# Altium PCB demo_board_routed_DDR.PcbDoc (part 1 of 2)
Units mil, origin at the board's own origin, x right, y up, seen from the top; angles counter-clockwise.
Board outline 6000 x 4000 mil, 4 copper layers (L1, L2, L3, L4), stack 64.6 mil thick; 2 components, 43 nets, 316 pads, 106 vias.
Unrouted connection lines stored in the file: 5.
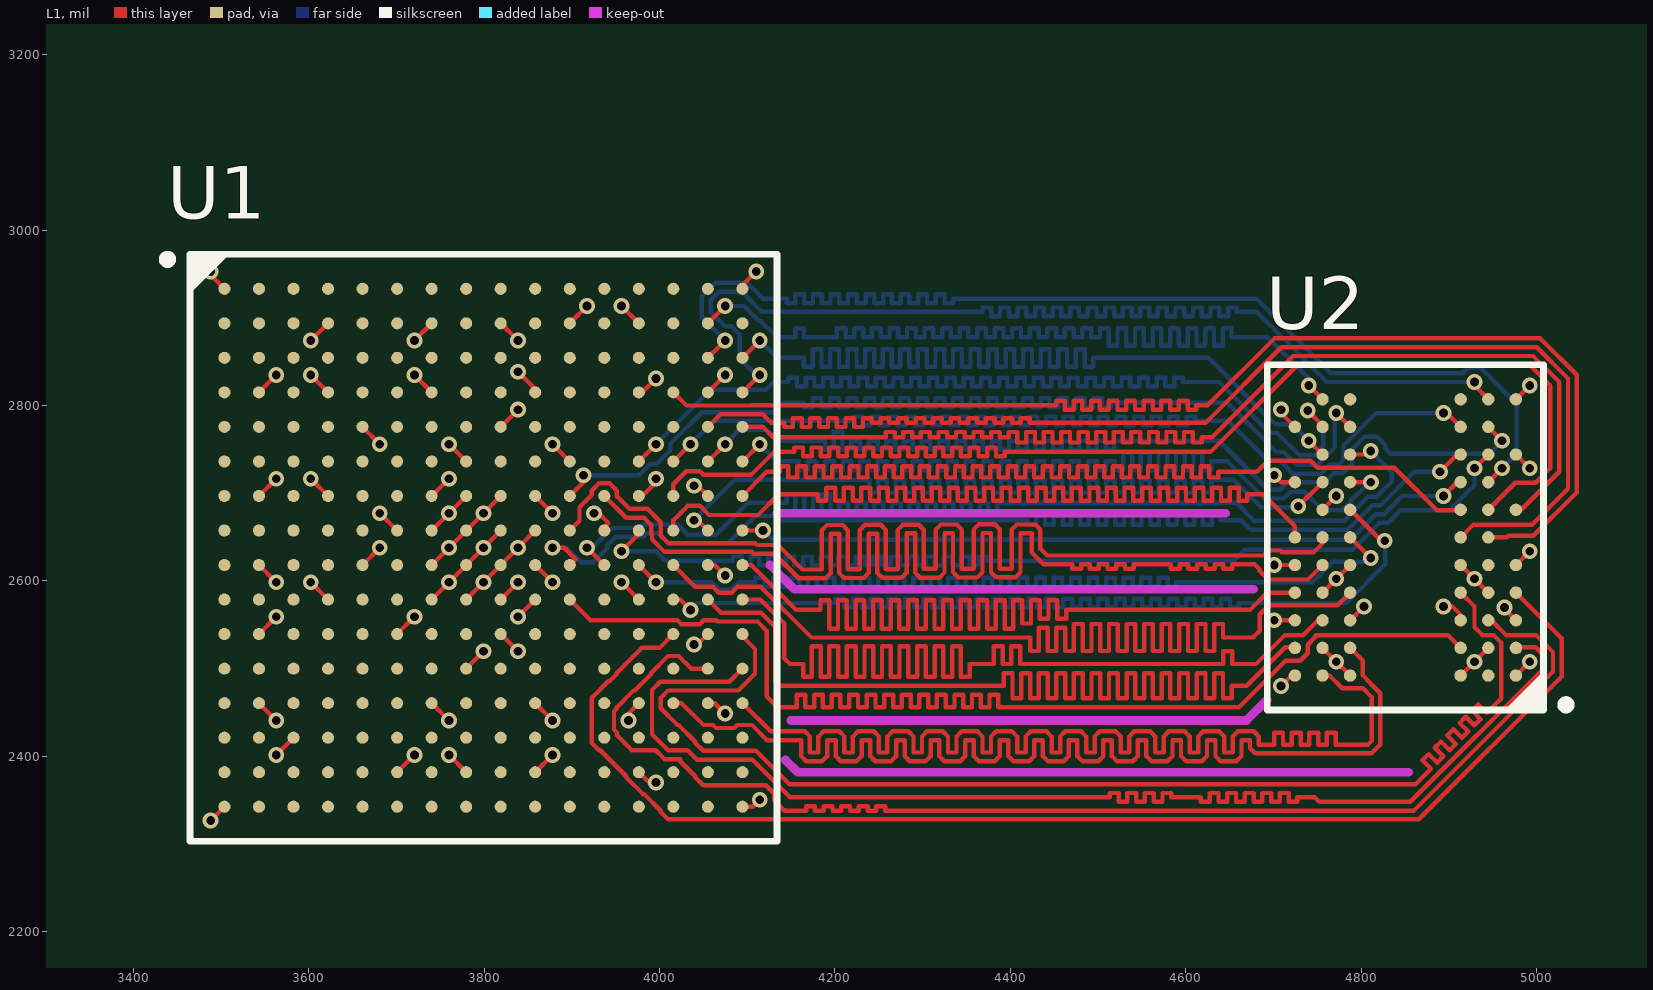
[diagram p0: L1 view]
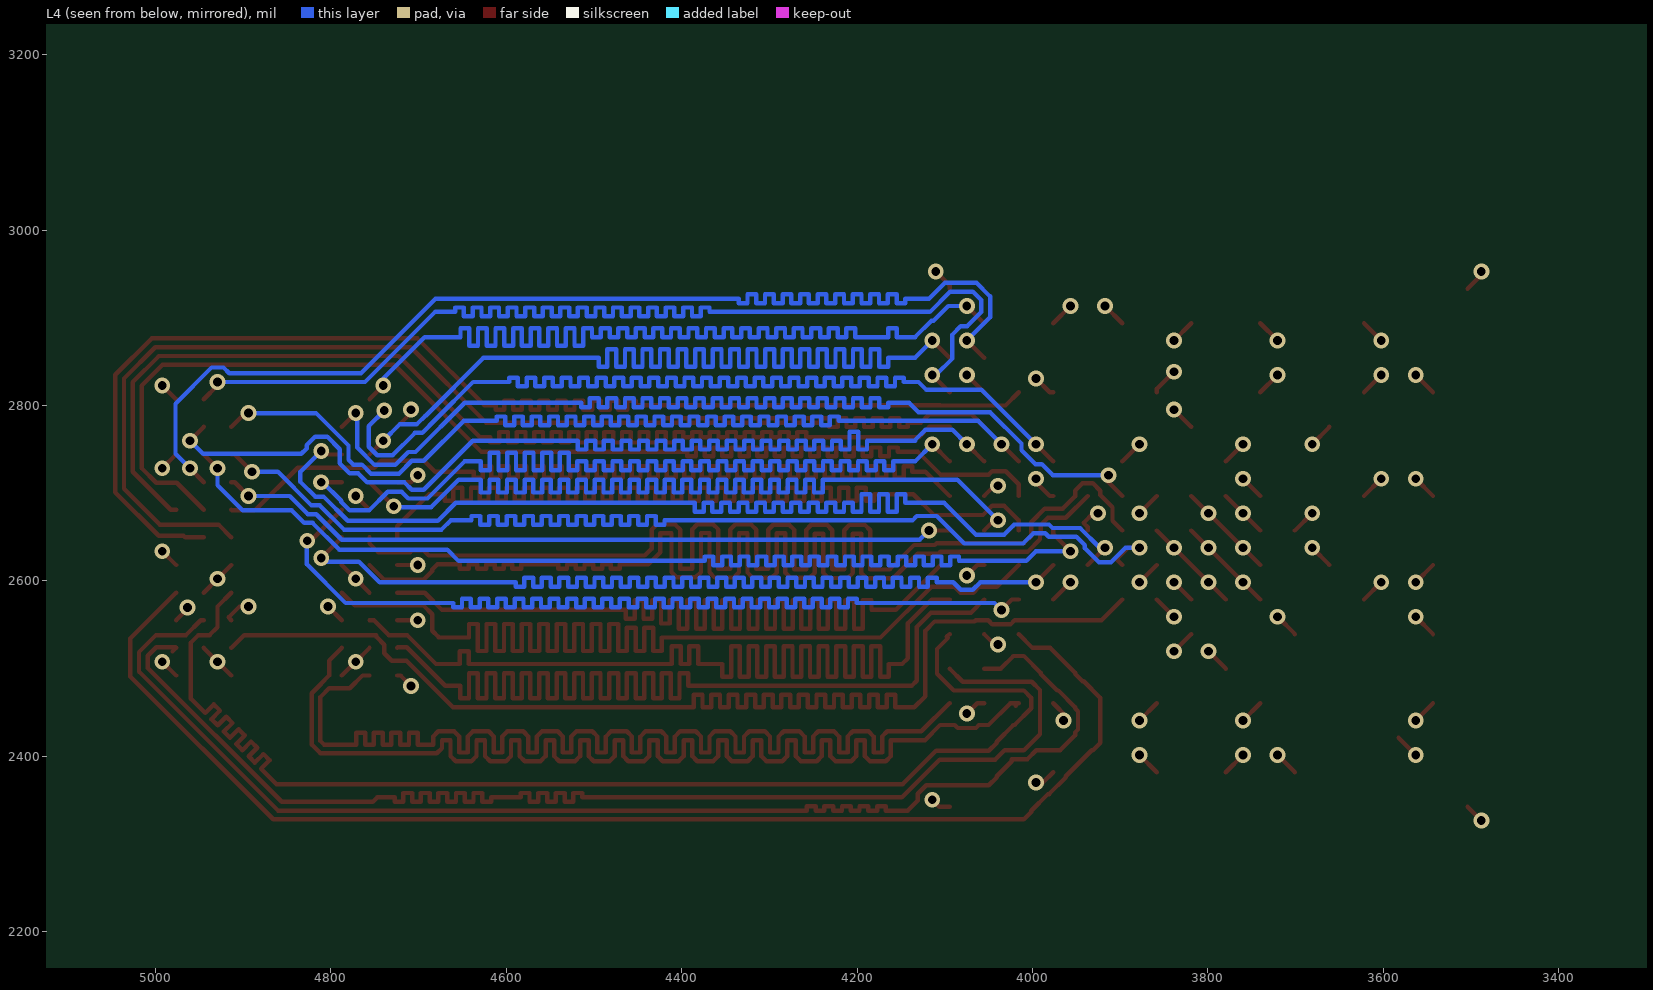
[diagram p1: L4 view, seen from below]
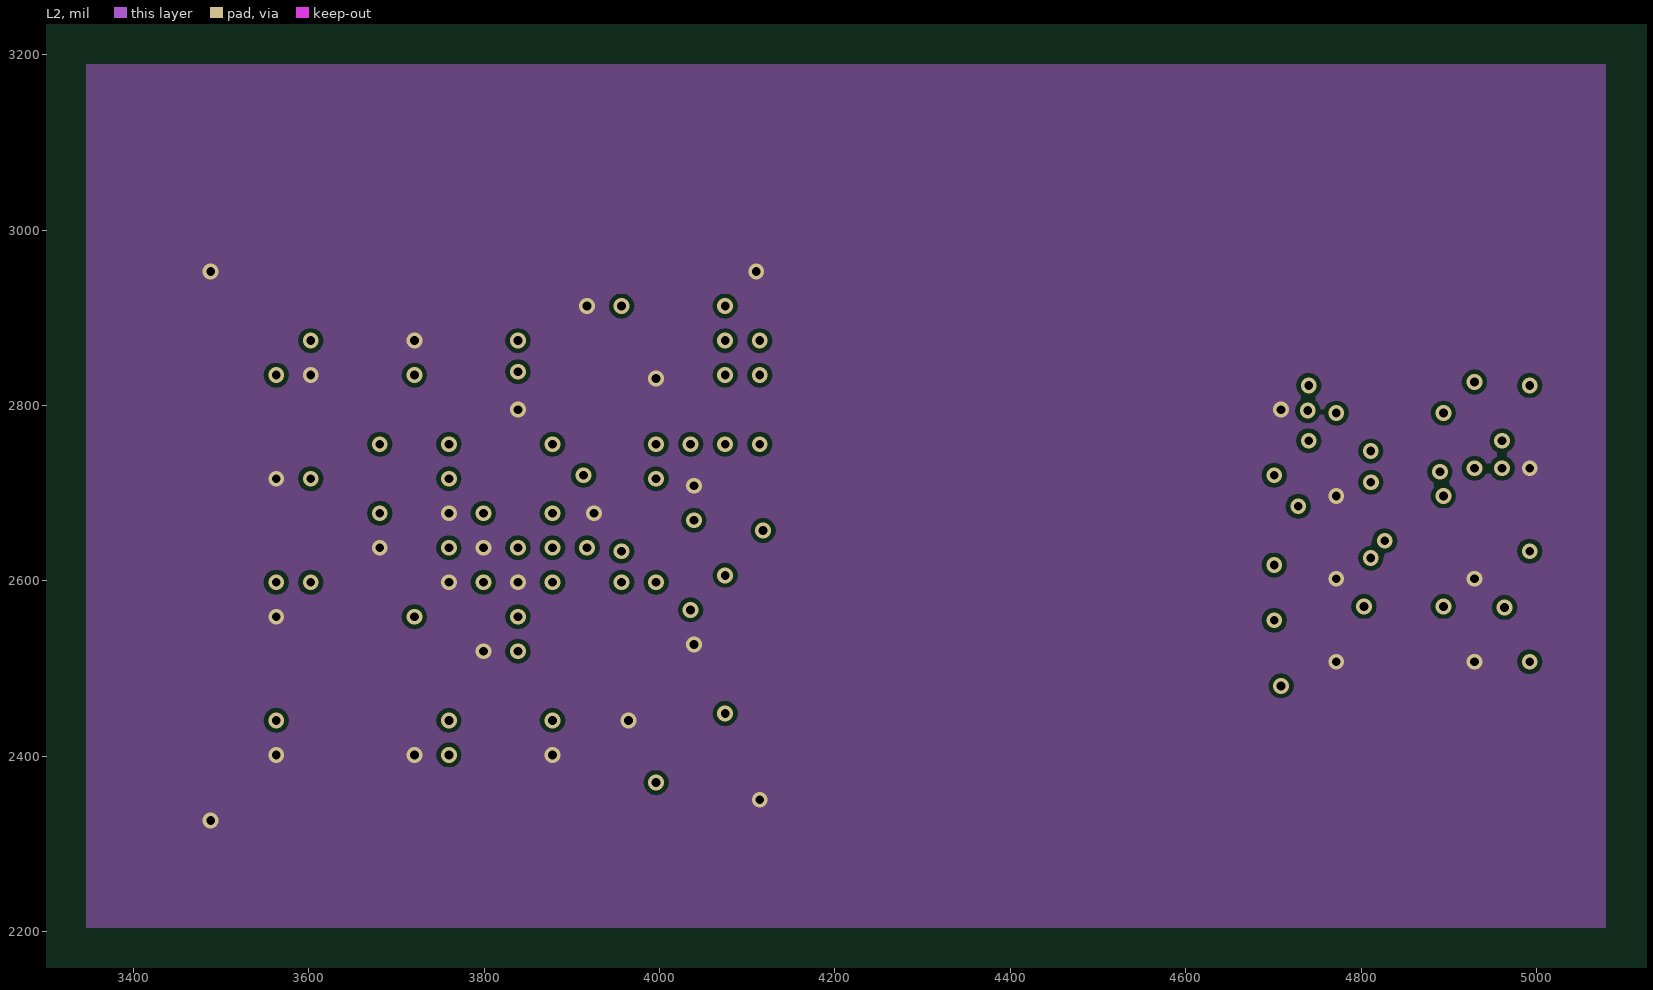
[diagram p2: L2]
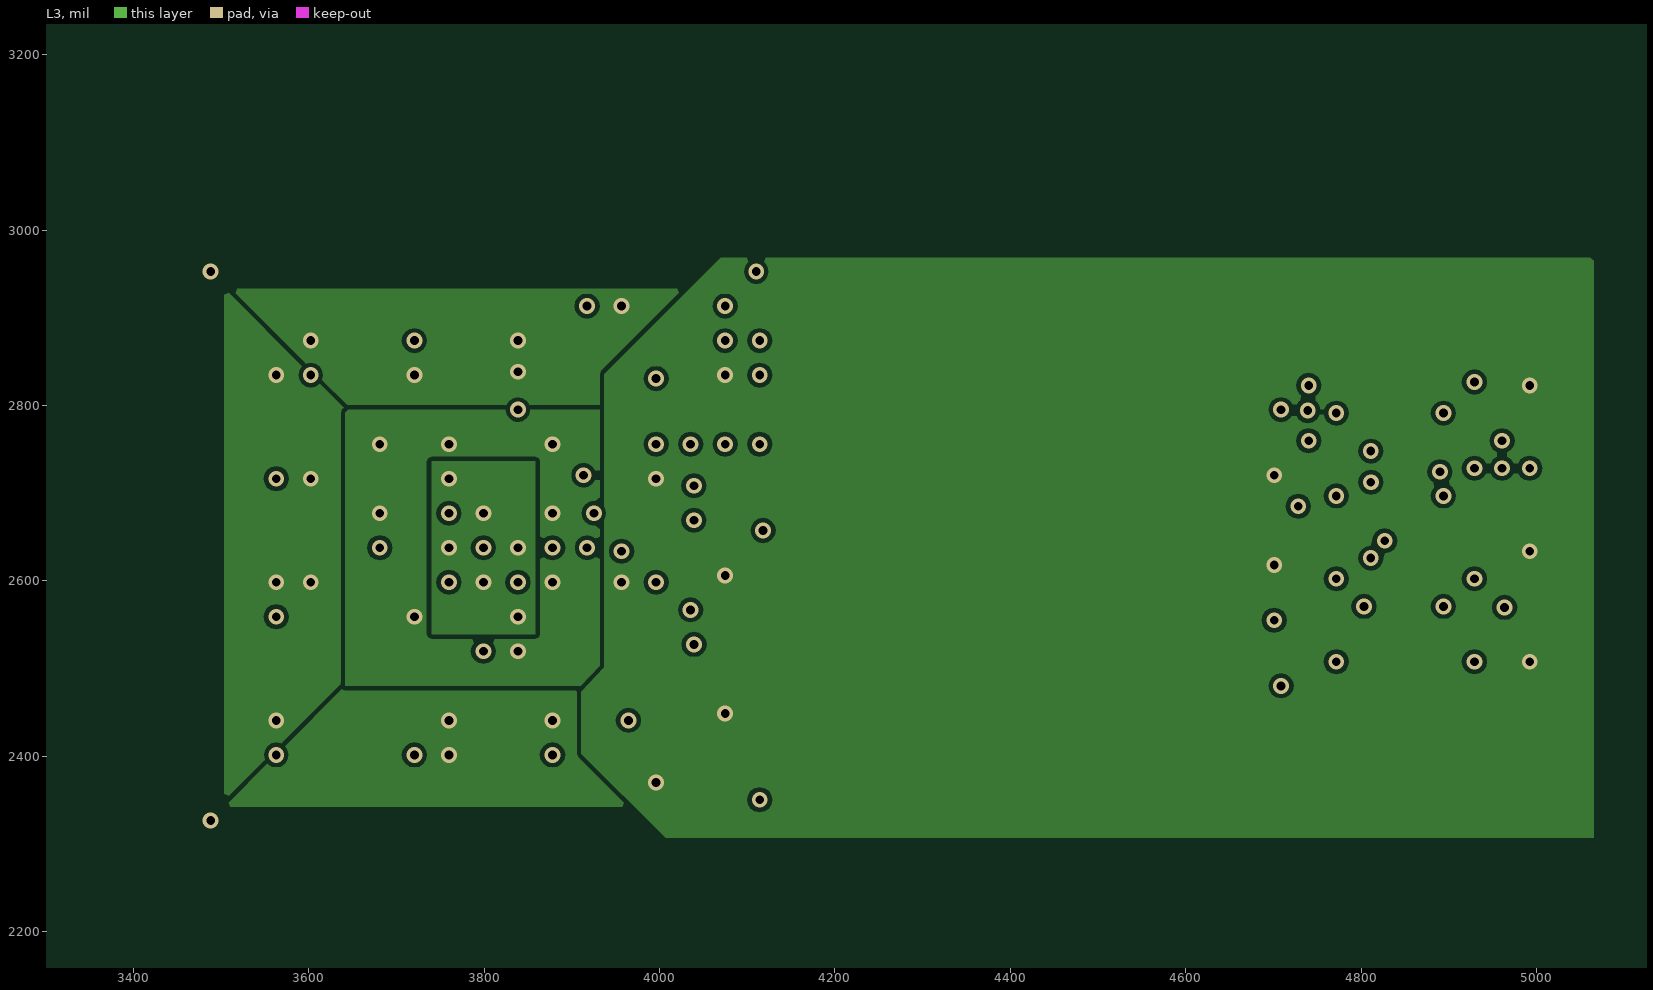
[diagram p3: L3]

## Layer stack, top to bottom
Top Solder: solder mask 0.4, Solder Resist, Dk 3.5
L1: signal copper 1.4
Prepreg 1: prepreg 6.7, FR-408, Dk 3.66
L2: signal copper 0.7
Core: core 47, FR-408, Dk 3.66
L3: signal copper 0.7
Prepreg 2: prepreg 6.7, FR-408, Dk 3.66
L4: signal copper 1.4
Bottom Solder: solder mask 0.4, Solder Resist, Dk 3.5

## Board outline
1000,1000 7000,1000 7000,5000 1000,5000

## Design rules (kind name [scope] priority, off if disabled: settings)
Clearance [All] p1: gap=5
DiffPairsRouting [All] p1: maxlimit=10 minlimit=5 mostfreqgap=5 toplayer_minwidth=5 toplayer_maxwidth=15 toplayer_prefwidth=5 midlayer1_minwidth=5 midlayer1_maxwidth=15 midlayer1_prefwidth=5 midlayer2_minwidth=5 midlayer2_maxwidth=15 midlayer2_prefwidth=5 bottomlayer_minwidth=5 bottomlayer_maxwidth=15 bottomlayer_prefwidth=5 maxuncoupledlength=500
HoleSize [All] p1: absolutevalues=TRUE maxlimit=100 minlimit=10 maxpercent=80.000 minpercent=20.000
MinimumAnnularRing [All] p1: minimumring=4
PlaneClearance [All] p1: clearance=10
PlaneConnect PlaneConnect_via [IsVia] p1: planeconnectstyle=Direct reliefexpansion=20 reliefentries=4 reliefconductorwidth=10 reliefairgap=10
PlaneConnect [All] p2: planeconnectstyle=Relief reliefexpansion=20 reliefentries=4 reliefconductorwidth=10 reliefairgap=10
PolygonConnect PolygonConnect_via [All vs IsVia] p1: connectstyle=Direct reliefconductorwidth=10 reliefentries=4 polygonreliefangle="90 Angle" airgapwidth=10
PolygonConnect [All] p2: connectstyle=Relief reliefconductorwidth=10 reliefentries=4 polygonreliefangle="90 Angle" airgapwidth=10
RoutingVias [All] p1: holewidth=10 width=32 viastyle="Through Hole" minholewidth=10 minwidth=18 maxholewidth=50 maxwidth=100
SolderMaskExpansion [All] p1: expansion=4
UnpouredPolygon [All] p1: allowunpoured=FALSE
Width [All] p1: maxlimit=100 minlimit=5 preferedwidth=10
25 further rules are at their usual default settings.

## Classes and differential pairs
net class DDR_O: BA0 BA1 BA2 CAS# CK_N CK_P CKE DM/RDQS DQS_N DQS_P NetU2_A2 ODT RAS# WE#
net class DDR_D: DQ0 DQ1 DQ2 DQ3 DQ4 DQ5 DQ6 DQ7
net class DDR_A: A0 A1 A2 A3 A4 A5 A6 A7 A8 A9 A10 A11 A12 A13
differential pair CK: +CK_P -CK_N
differential pair DQS: +DQS_P -DQS_N

## Components (designator, comment, footprint, x,y, rotation, side; value= is the part's Value field where it differs from the comment)
U1 "XC6SLX16-2FTG256C" Xilinx_FT256 3799.21,2637.8 r0 top
U2 "AS4C128M8D2-25BCN" Alliance_FBGA60 4850.39,2649.61 r180 top

## Footprints (in the part's own frame and the unit in brackets; to place one, negate y for a bottom-side part, rotate by r counter-clockwise, add the part's x,y. Pads: shape width x height; smd on the part's side, far side on the other; paste and mask are expansions set on the pad)
Alliance_FBGA60 [mm] "BGA, 60-Leads, Body 8.00x10.00mmx1.20mm, Pitch 0.80mm"
  round 0.36 smd: A1(-3.2,4) A2(-2.4,4) A3(-1.6,4) A7(1.6,4) A8(2.4,4) A9(3.2,4) B1(-3.2,3.2) B2(-2.4,3.2) B3(-1.6,3.2) B7(1.6,3.2) B8(2.4,3.2) B9(3.2,3.2) C1(-3.2,2.4) C2(-2.4,2.4) C3(-1.6,2.4) C7(1.6,2.4) C8(2.4,2.4) C9(3.2,2.4) D1(-3.2,1.6) D2(-2.4,1.6) D3(-1.6,1.6) D7(1.6,1.6) D8(2.4,1.6) D9(3.2,1.6) E1(-3.2,0.8) E2(-2.4,0.8) E3(-1.6,0.8) E7(1.6,0.8) E8(2.4,0.8) E9(3.2,0.8) F2(-2.4,0) F3(-1.6,0) F7(1.6,0) F8(2.4,0) F9(3.2,0) G1(-3.2,-0.8) G2(-2.4,-0.8) G3(-1.6,-0.8) G7(1.6,-0.8) G8(2.4,-0.8) H2(-2.4,-1.6) H3(-1.6,-1.6) H7(1.6,-1.6) H8(2.4,-1.6) H9(3.2,-1.6) J1(-3.2,-2.4) J2(-2.4,-2.4) J3(-1.6,-2.4) J7(1.6,-2.4) J8(2.4,-2.4) K2(-2.4,-3.2) K3(-1.6,-3.2) K7(1.6,-3.2) K8(2.4,-3.2) K9(3.2,-3.2) L1(-3.2,-4) L2(-2.4,-4) L3(-1.6,-4) L7(1.6,-4) L8(2.4,-4)
  silkscreen extent -4.78,-5 4,5, body extent -4,-5 4,5, height 1.2
Xilinx_FT256 [mm] "BGA, 256-Leads, Body 17.00x17.00mmx1.55mm, Pitch 1.00mm"
  round 0.35 smd: A1(-7.5,7.5) A2(-6.5,7.5) A3(-5.5,7.5) A4(-4.5,7.5) A5(-3.5,7.5) A6(-2.5,7.5) A7(-1.5,7.5) A8(-0.5,7.5) A9(0.5,7.5) A10(1.5,7.5) A11(2.5,7.5) A12(3.5,7.5) A13(4.5,7.5) A14(5.5,7.5) A15(6.5,7.5) A16(7.5,7.5) B1(-7.5,6.5) B2(-6.5,6.5) B3(-5.5,6.5) B4(-4.5,6.5) B5(-3.5,6.5) B6(-2.5,6.5) B7(-1.5,6.5) B8(-0.5,6.5) B9(0.5,6.5) B10(1.5,6.5) B11(2.5,6.5) B12(3.5,6.5) B13(4.5,6.5) B14(5.5,6.5) B15(6.5,6.5) B16(7.5,6.5) C1(-7.5,5.5) C2(-6.5,5.5) C3(-5.5,5.5) C4(-4.5,5.5) C5(-3.5,5.5) C6(-2.5,5.5) C7(-1.5,5.5) C8(-0.5,5.5) C9(0.5,5.5) C10(1.5,5.5) C11(2.5,5.5) C12(3.5,5.5) C13(4.5,5.5) C14(5.5,5.5) C15(6.5,5.5) C16(7.5,5.5) D1(-7.5,4.5) D2(-6.5,4.5) D3(-5.5,4.5) D4(-4.5,4.5) D5(-3.5,4.5) D6(-2.5,4.5) D7(-1.5,4.5) D8(-0.5,4.5) D9(0.5,4.5) D10(1.5,4.5) D11(2.5,4.5) D12(3.5,4.5) D13(4.5,4.5) D14(5.5,4.5) D15(6.5,4.5) D16(7.5,4.5) E1(-7.5,3.5) E2(-6.5,3.5) E3(-5.5,3.5) E4(-4.5,3.5) E5(-3.5,3.5) E6(-2.5,3.5) E7(-1.5,3.5) E8(-0.5,3.5) E9(0.5,3.5) E10(1.5,3.5) E11(2.5,3.5) E12(3.5,3.5) E13(4.5,3.5) E14(5.5,3.5) E15(6.5,3.5) E16(7.5,3.5) F1(-7.5,2.5) F2(-6.5,2.5) F3(-5.5,2.5) F4(-4.5,2.5) F5(-3.5,2.5) F6(-2.5,2.5) F7(-1.5,2.5) F8(-0.5,2.5) F9(0.5,2.5) F10(1.5,2.5) F11(2.5,2.5) F12(3.5,2.5) F13(4.5,2.5) F14(5.5,2.5) F15(6.5,2.5) F16(7.5,2.5) G1(-7.5,1.5) G2(-6.5,1.5) G3(-5.5,1.5) G4(-4.5,1.5) G5(-3.5,1.5) G6(-2.5,1.5) G7(-1.5,1.5) G8(-0.5,1.5) G9(0.5,1.5) G10(1.5,1.5) G11(2.5,1.5) G12(3.5,1.5) G13(4.5,1.5) G14(5.5,1.5) G15(6.5,1.5) G16(7.5,1.5) H1(-7.5,0.5) H2(-6.5,0.5) H3(-5.5,0.5) H4(-4.5,0.5) H5(-3.5,0.5) H6(-2.5,0.5) H7(-1.5,0.5) H8(-0.5,0.5) H9(0.5,0.5) H10(1.5,0.5) H11(2.5,0.5) H12(3.5,0.5) H13(4.5,0.5) H14(5.5,0.5) H15(6.5,0.5) H16(7.5,0.5) J1(-7.5,-0.5) J2(-6.5,-0.5) J3(-5.5,-0.5) J4(-4.5,-0.5) J5(-3.5,-0.5) J6(-2.5,-0.5) J7(-1.5,-0.5) J8(-0.5,-0.5) J9(0.5,-0.5) J10(1.5,-0.5) J11(2.5,-0.5) J12(3.5,-0.5) J13(4.5,-0.5) J14(5.5,-0.5) J15(6.5,-0.5) J16(7.5,-0.5) K1(-7.5,-1.5) K2(-6.5,-1.5) K3(-5.5,-1.5) K4(-4.5,-1.5) K5(-3.5,-1.5) K6(-2.5,-1.5) K7(-1.5,-1.5) K8(-0.5,-1.5) K9(0.5,-1.5) K10(1.5,-1.5) K11(2.5,-1.5) K12(3.5,-1.5) K13(4.5,-1.5) K14(5.5,-1.5) K15(6.5,-1.5) K16(7.5,-1.5) L1(-7.5,-2.5) L2(-6.5,-2.5) L3(-5.5,-2.5) L4(-4.5,-2.5) L5(-3.5,-2.5) L6(-2.5,-2.5) L7(-1.5,-2.5) L8(-0.5,-2.5) L9(0.5,-2.5) L10(1.5,-2.5) L11(2.5,-2.5) L12(3.5,-2.5) L13(4.5,-2.5) L14(5.5,-2.5) L15(6.5,-2.5) L16(7.5,-2.5) M1(-7.5,-3.5) M2(-6.5,-3.5) M3(-5.5,-3.5) M4(-4.5,-3.5) M5(-3.5,-3.5) M6(-2.5,-3.5) M7(-1.5,-3.5) M8(-0.5,-3.5) M9(0.5,-3.5) M10(1.5,-3.5) M11(2.5,-3.5) M12(3.5,-3.5) M13(4.5,-3.5) M14(5.5,-3.5) M15(6.5,-3.5) M16(7.5,-3.5) N1(-7.5,-4.5) N2(-6.5,-4.5) N3(-5.5,-4.5) N4(-4.5,-4.5) N5(-3.5,-4.5) N6(-2.5,-4.5) N7(-1.5,-4.5) N8(-0.5,-4.5) N9(0.5,-4.5) N10(1.5,-4.5) N11(2.5,-4.5) N12(3.5,-4.5) N13(4.5,-4.5) N14(5.5,-4.5) N15(6.5,-4.5) N16(7.5,-4.5) P1(-7.5,-5.5) P2(-6.5,-5.5) P3(-5.5,-5.5) P4(-4.5,-5.5) P5(-3.5,-5.5) P6(-2.5,-5.5) P7(-1.5,-5.5) P8(-0.5,-5.5) P9(0.5,-5.5) P10(1.5,-5.5) P11(2.5,-5.5) P12(3.5,-5.5) P13(4.5,-5.5) P14(5.5,-5.5) P15(6.5,-5.5) P16(7.5,-5.5) R1(-7.5,-6.5) R2(-6.5,-6.5) R3(-5.5,-6.5) R4(-4.5,-6.5) R5(-3.5,-6.5) R6(-2.5,-6.5) R7(-1.5,-6.5) R8(-0.5,-6.5) R9(0.5,-6.5) R10(1.5,-6.5) R11(2.5,-6.5) R12(3.5,-6.5) R13(4.5,-6.5) R14(5.5,-6.5) R15(6.5,-6.5) R16(7.5,-6.5) T1(-7.5,-7.5) T2(-6.5,-7.5) T3(-5.5,-7.5) T4(-4.5,-7.5) T5(-3.5,-7.5) T6(-2.5,-7.5) T7(-1.5,-7.5) T8(-0.5,-7.5) T9(0.5,-7.5) T10(1.5,-7.5) T11(2.5,-7.5) T12(3.5,-7.5) T13(4.5,-7.5) T14(5.5,-7.5) T15(6.5,-7.5) T16(7.5,-7.5)
  silkscreen extent -9.27,-8.5 8.5,8.5, body extent -8.5,-8.5 8.5,8.5, height 1.55

## Via types
v1: diameter 18, hole 10, L1 to L4, 106 vias

## Nets (pads, with @x,y where several pads share a name; then routed paths per layer and width w, separated by ;. In a path a pad name is that pad's centre, name@x,y a point inside that pad or via, vN(x,y) a via of type N, cw(c..) or ccw(c..) an arc to the next point about the centre after c; other vN are vias at no path point)
A0: U1.H15 U2.H8 | length 1377.3
  L1 w5: v1(4039.18,2669.1) 4039.18,2673.05 4039.36,2673.24 U1.H15@4055.12,2657.48 ; v1(4728.34,2685.03) U2.H8@4755.91,2712.6
  L4 w5: v1(4039.18,2669.1) 4085.63,2715.55 4098.43,2715.55 4239.09,2715.55 4239.09,2700.8 4249.09,2700.8 4249.09,2715.55 4259.09,2715.55 4259.09,2700.8 4269.09,2700.8 4269.09,2715.55 4279.09,2715.55 4279.09,2700.8 4289.09,2700.8 4289.09,2715.55 4299.09,2715.55 4299.09,2700.8 4309.09,2700.8 4309.09,2715.55 4319.09,2715.55 4319.09,2700.8 4329.09,2700.8 4329.09,2715.55 4339.09,2715.55 4339.09,2700.8 4349.09,2700.8 4349.09,2715.55 4359.09,2715.55 4359.09,2700.8 4369.09,2700.8 4369.09,2715.55 4379.09,2715.55 4379.09,2700.8 4389.09,2700.8 4389.09,2715.55 4399.09,2715.55 4399.09,2700.8 4409.09,2700.8 4409.09,2715.55 4419.09,2715.55 4419.09,2700.8 4429.09,2700.8 4429.09,2715.55 4439.09,2715.55 4439.09,2700.8 4449.09,2700.8 4449.09,2715.55 4459.09,2715.55 4459.09,2700.8 4469.09,2700.8 4469.09,2715.55 4479.09,2715.55 4479.09,2700.8 4489.09,2700.8 4489.09,2715.55 4499.09,2715.55 4499.09,2700.8 4509.09,2700.8 4509.09,2715.55 4519.09,2715.55 4519.09,2700.8 4529.09,2700.8 4529.09,2715.55 4539.09,2715.55 4539.09,2700.8 4549.09,2700.8 4549.09,2715.55 4559.09,2715.55 4559.09,2700.8 4569.09,2700.8 4569.09,2715.55 4579.09,2715.55 4579.09,2700.8 4589.09,2700.8 4589.09,2715.55 4599.09,2715.55 4599.09,2700.8 4609.09,2700.8 4609.09,2715.55 4619.09,2715.55 4619.09,2700.8 4629.09,2700.8 4629.09,2715.55 4639.09,2715.55 4649.09,2715.55 4654.09,2715.55 4685.67,2683.97 4727.28,2683.97 v1(4728.34,2685.03)
A1: U1.H16 U2.H3 | length 850.5
  L1 w5: U1.H16@4094.49,2657.48 v1(4118.1,2657.47) ; v1(4893.7,2696.85) 4909.45,2712.6 U2.H3@4913.39,2712.6
  L4 w5: v1(4118.1,2657.47) 4128.72,2646.85 4145.67,2646.85 4598.43,2646.85 4787.42,2646.85 4816.66,2676.1 4826.14,2676.1 4846.89,2696.85 v1(4893.7,2696.85)
A2: U1.F16 U2.H7 | length 1380
  L1 w5: U1.F16@4094.49,2736.22 v1(4114.17,2755.91) ; U2.H7@4787.4,2712.6 v1(4811.02,2712.6)
  L4 w5: v1(4114.17,2755.91) 4133.86,2736.22 4149.61,2736.22 4158.86,2736.22 4158.86,2726.22 4168.86,2726.22 4168.86,2736.22 4178.86,2736.22 4178.86,2726.22 4188.86,2726.22 4188.86,2736.22 4198.86,2736.22 4198.86,2726.22 4208.86,2726.22 4208.86,2736.22 4218.86,2736.22 4218.86,2726.22 4228.86,2726.22 4228.86,2736.22 4238.86,2736.22 4238.86,2726.22 4248.86,2726.22 4248.86,2736.22 4258.86,2736.22 4258.86,2726.22 4268.86,2726.22 4268.86,2736.22 4278.86,2736.22 4278.86,2726.22 4288.86,2726.22 4288.86,2736.22 4298.86,2736.22 4298.86,2726.22 4308.86,2726.22 4308.86,2736.22 4318.86,2736.22 4318.86,2726.22 4328.86,2726.22 4328.86,2736.22 4338.86,2736.22 4338.86,2726.22 4348.86,2726.22 4348.86,2736.22 4358.86,2736.22 4358.86,2726.22 4368.86,2726.22 4368.86,2736.22 4378.86,2736.22 4378.86,2726.22 4388.86,2726.22 4388.86,2736.22 4398.86,2736.22 4398.86,2726.22 4408.86,2726.22 4408.86,2736.22 4418.86,2736.22 4418.86,2726.22 4428.86,2726.22 4428.86,2736.22 4438.86,2736.22 4438.86,2726.22 4448.86,2726.22 4448.86,2736.22 4458.86,2736.22 4458.86,2726.22 4468.86,2726.22 4468.86,2736.22 4478.86,2736.22 4478.86,2726.22 4488.86,2726.22 4488.86,2736.22 4498.86,2736.22 4498.86,2726.22 4508.86,2726.22 4508.86,2736.22 4518.86,2736.22 4518.86,2726.22 4528.86,2726.22 4528.86,2736.22 4528.86,2746.22 4538.86,2746.22 4538.86,2736.22 4538.86,2726.22 4548.86,2726.22 4548.86,2736.22 4548.86,2746.22 4558.86,2746.22 4558.86,2736.22 4558.86,2726.22 4568.86,2726.22 4568.86,2736.22 4568.86,2746.22 4578.86,2746.22 4578.86,2736.22 4578.86,2726.22 4588.86,2726.22 4588.86,2736.22 4588.86,2746.22 4598.86,2746.22 4598.86,2736.22 4598.86,2726.22 4608.86,2726.22 4608.86,2736.22 4608.86,2746.22 4618.86,2746.22 4618.86,2736.22 4618.86,2726.22 4628.86,2726.22 4628.86,2736.22 4633.86,2736.22 4647.56,2736.22 4689.81,2693.97 4711.76,2693.97 4719.33,2701.53 4735.17,2701.53 4756.36,2680.35 4778.49,2680.35 4788.15,2690.02 4788.15,2691.31 4809.44,2712.6 v1(4811.02,2712.6)
A3: U1.H13 U2.J2 | length 1376.2
  L1 w5: v1(3956.69,2633.86) 3976.38,2653.54 U1.H13@3976.38,2657.48 ; v1(4929.13,2728.35) U2.J2@4944.88,2744.09
  L4 w5: v1(3956.69,2633.86) 3996.06,2633.86 4007.13,2622.79 4078.74,2622.79 4083.74,2622.79 4083.74,2627.79 4093.74,2627.79 4093.74,2622.79 4093.74,2617.79 4103.74,2617.79 4103.74,2622.79 4103.74,2627.79 4113.74,2627.79 4113.74,2622.79 4113.74,2617.79 4123.74,2617.79 4123.74,2622.79 4123.74,2627.79 4133.74,2627.79 4133.74,2622.79 4133.74,2617.79 4143.74,2617.79 4143.74,2622.79 4143.74,2627.79 4153.74,2627.79 4153.74,2622.79 4153.74,2617.79 4163.74,2617.79 4163.74,2622.79 4163.74,2627.79 4173.74,2627.79 4173.74,2622.79 4173.74,2617.79 4183.74,2617.79 4183.74,2622.79 4183.74,2627.79 4193.74,2627.79 4193.74,2622.79 4193.74,2617.79 4203.74,2617.79 4203.74,2622.79 4203.74,2627.79 4213.74,2627.79 4213.74,2622.79 4213.74,2617.79 4223.74,2617.79 4223.74,2622.79 4223.74,2627.79 4233.74,2627.79 4233.74,2622.79 4233.74,2617.79 4243.74,2617.79 4243.74,2622.79 4243.74,2627.79 4253.74,2627.79 4253.74,2622.79 4253.74,2617.79 4263.74,2617.79 4263.74,2622.79 4263.74,2627.79 4273.74,2627.79 4273.74,2622.79 4273.74,2617.79 4283.74,2617.79 4283.74,2622.79 4283.74,2627.79 4293.74,2627.79 4293.74,2622.79 4293.74,2617.79 4303.74,2617.79 4303.74,2622.79 4303.74,2627.79 4313.74,2627.79 4313.74,2622.79 4313.74,2617.79 4323.74,2617.79 4323.74,2622.79 4323.74,2627.79 4333.74,2627.79 4333.74,2622.79 4333.74,2617.79 4343.74,2617.79 4343.74,2622.79 4343.74,2627.79 4353.74,2627.79 4353.74,2622.79 4353.74,2617.79 4363.74,2617.79 4363.74,2622.79 4363.74,2627.79 4373.74,2627.79 4373.74,2622.79 4374.02,2622.79 4654.29,2622.79 4667.17,2635.67 4790.38,2635.67 4820.8,2666.1 4830.28,2666.1 4844.54,2680.35 4900.54,2680.35 4929.13,2708.95 v1(4929.13,2728.35)
A4: U1.C16 U2.J8 | length 1383.4
  L1 w5: U1.C16@4094.49,2854.33 v1(4114.17,2874.02) ; v1(4740.16,2759.84) U2.J8@4755.91,2744.09
  L4 w5: v1(4114.17,2874.02) 4133.86,2854.33 4149.61,2854.33 4154.61,2854.33 4164.61,2854.33 4164.61,2844.33 4174.61,2844.33 4174.61,2854.33 4174.61,2864.33 4184.61,2864.33 4184.61,2854.33 4184.61,2844.33 4194.61,2844.33 4194.61,2854.33 4194.61,2864.33 4204.61,2864.33 4204.61,2854.33 4204.61,2844.33 4214.61,2844.33 4214.61,2854.33 4214.61,2864.33 4224.61,2864.33 4224.61,2854.33 4224.61,2844.33 4234.61,2844.33 4234.61,2854.33 4234.61,2864.33 4244.61,2864.33 4244.61,2854.33 4244.61,2844.33 4254.61,2844.33 4254.61,2854.33 4254.61,2864.33 4264.61,2864.33 4264.61,2854.33 4264.61,2844.33 4274.61,2844.33 4274.61,2854.33 4274.61,2864.33 4284.61,2864.33 4284.61,2854.33 4284.61,2844.33 4294.61,2844.33 4294.61,2854.33 4294.61,2864.33 4304.61,2864.33 4304.61,2854.33 4304.61,2844.33 4314.61,2844.33 4314.61,2854.33 4314.61,2864.33 4324.61,2864.33 4324.61,2854.33 4324.61,2844.33 4334.61,2844.33 4334.61,2854.33 4334.61,2864.33 4344.61,2864.33 4344.61,2854.33 4344.61,2844.33 4354.61,2844.33 4354.61,2854.33 4354.61,2864.33 4364.61,2864.33 4364.61,2854.33 4364.61,2844.33 4374.61,2844.33 4374.61,2854.33 4374.61,2864.33 4384.61,2864.33 4384.61,2854.33 4384.61,2844.33 4394.61,2844.33 4394.61,2854.33 4394.61,2864.33 4404.61,2864.33 4404.61,2854.33 4404.61,2844.33 4414.61,2844.33 4414.61,2854.33 4414.61,2864.33 4424.61,2864.33 4424.61,2854.33 4424.61,2844.33 4434.61,2844.33 4434.61,2854.33 4434.61,2864.33 4444.61,2864.33 4444.61,2854.33 4444.61,2844.33 4454.61,2844.33 4454.61,2854.33 4454.61,2864.33 4464.61,2864.33 4464.61,2854.33 4464.61,2844.33 4474.61,2844.33 4474.61,2854.33 4474.61,2864.33 4484.61,2864.33 4484.61,2854.33 4484.61,2844.33 4494.61,2844.33 4494.61,2854.33 4500,2854.33 4586.61,2854.33 4625.98,2854.33 4691.87,2788.44 4692.16,2788.44 4701.83,2778.78 4721.22,2778.78 v1(4740.16,2759.84)
A5: U1.J11 U2.J3 | length 1378.7
  L1 w5: v1(3877.95,2637.8) 3891.23,2637.8 3904.28,2624.75 U1.J11@3897.64,2618.11 ; v1(4889.75,2724.4) 4909.44,2744.09 U2.J3@4913.39,2744.09
  L4 w5: v1(3877.95,2637.8) 3893.99,2637.8 3910.49,2621.3 3924.16,2621.3 3940.19,2637.33 3940.19,2640.69 3949.86,2650.36 3981.35,2650.36 3985.29,2654.3 3998.96,2654.3 4010.65,2642.6 4077.83,2642.6 4109.2,2673.97 4131.84,2673.97 4136.84,2668.98 4370.08,2668.98 4414.37,2668.98 4419.53,2668.98 4419.53,2663.98 4429.53,2663.98 4429.53,2668.98 4429.53,2673.98 4439.53,2673.98 4439.53,2668.98 4439.53,2663.98 4449.53,2663.98 4449.53,2668.98 4449.53,2673.98 4459.53,2673.98 4459.53,2668.98 4459.53,2663.98 4469.53,2663.98 4469.53,2668.98 4469.53,2673.98 4479.53,2673.98 4479.53,2668.98 4479.53,2663.98 4489.53,2663.98 4489.53,2668.98 4489.53,2673.98 4499.53,2673.98 4499.53,2668.98 4499.53,2663.98 4509.53,2663.98 4509.53,2668.98 4509.53,2673.98 4519.53,2673.98 4519.53,2668.98 4519.53,2663.98 4529.53,2663.98 4529.53,2668.98 4529.53,2673.98 4539.53,2673.98 4539.53,2668.98 4539.53,2663.98 4549.53,2663.98 4549.53,2668.98 4549.53,2673.98 4559.53,2673.98 4559.53,2668.98 4559.53,2663.98 4569.53,2663.98 4569.53,2668.98 4569.53,2673.98 4579.53,2673.98 4579.53,2668.98 4579.53,2663.98 4589.53,2663.98 4589.53,2668.98 4589.53,2673.98 4599.53,2673.98 4599.53,2668.98 4599.53,2663.98 4609.53,2663.98 4609.53,2668.98 4609.53,2673.98 4619.53,2673.98 4619.53,2668.98 4619.53,2663.98 4629.53,2663.98 4629.53,2668.98 4629.53,2673.98 4639.53,2673.98 4639.53,2668.98 4649.53,2668.98 4654.53,2668.98 4657.48,2668.98 4663.34,2668.98 4673.78,2658.53 4784.96,2658.53 4812.52,2686.1 4822,2686.1 4860.31,2724.41 v1@4889.75,2724.41
A6: U1.J12 U2.J7 | length 1375.6
  L1 w5: v1(3917.32,2637.8) U1.J12@3937.01,2618.11 ; U2.J7@4787.4,2744.09 4811.02,2744.09 v1(4811.01,2748.03)
  L4 w5: v1(3917.32,2637.8) 3923.15,2637.8 3945.72,2660.36 3977.21,2660.36 3981.15,2664.3 4021.03,2664.3 4022.68,2662.65 4022.68,2662.27 4032.35,2652.6 4064.38,2652.6 4100.76,2688.98 4125.98,2688.98 4134.92,2688.98 4144.92,2688.98 4144.92,2698.98 4154.92,2698.98 4154.92,2688.98 4154.92,2678.98 4164.92,2678.98 4164.92,2688.98 4164.92,2698.98 4174.92,2698.98 4174.92,2688.98 4174.92,2678.98 4184.92,2678.98 4184.92,2688.98 4184.92,2698.98 4194.92,2698.98 4194.92,2688.98 4194.92,2678.98 4204.92,2678.98 4204.92,2688.98 4214.92,2688.98 4214.92,2678.98 4224.92,2678.98 4224.92,2688.98 4234.92,2688.98 4234.92,2678.98 4244.92,2678.98 4244.92,2688.98 4254.92,2688.98 4254.92,2678.98 4264.92,2678.98 4264.92,2688.98 4274.92,2688.98 4274.92,2678.98 4284.92,2678.98 4284.92,2688.98 4294.92,2688.98 4294.92,2678.98 4304.92,2678.98 4304.92,2688.98 4314.92,2688.98 4314.92,2678.98 4324.92,2678.98 4324.92,2688.98 4334.92,2688.98 4334.92,2678.98 4344.92,2678.98 4344.92,2688.98 4354.92,2688.98 4354.92,2678.98 4364.92,2678.98 4364.92,2688.98 4374.92,2688.98 4374.92,2678.98 4384.92,2678.98 4384.92,2688.98 4394.92,2688.98 4404.92,2688.98 4414.92,2688.98 4424.92,2688.98 4434.92,2688.98 4444.92,2688.98 4454.92,2688.98 4464.92,2688.98 4474.92,2688.98 4484.92,2688.98 4494.92,2688.98 4504.92,2688.98 4514.92,2688.98 4524.92,2688.98 4534.92,2688.98 4544.92,2688.98 4554.92,2688.98 4564.92,2688.98 4574.92,2688.98 4584.92,2688.98 4594.92,2688.98 4604.92,2688.98 4614.92,2688.98 4624.92,2688.98 4629.92,2688.98 4657.48,2688.98 4677.92,2668.53 4780.81,2668.53 4808.38,2696.1 4817.86,2696.1 4834.65,2712.89 4834.65,2724.39 v1(4811.01,2748.03)
A7: U1.F15 U2.K2 | length 1382.8
  L1 w5: U1.F15@4055.12,2736.22 v1(4074.8,2755.91) ; U2.K2@4944.88,2775.59 v1(4960.63,2759.84)
  L4 w5: v1(4074.8,2755.91) 4091.3,2772.41 4122.05,2772.41 4133.86,2760.59 4133.86,2759.84 4149.61,2759.84 4181.1,2759.84 4188.62,2759.84 4188.62,2749.84 4198.62,2749.84 4198.62,2759.84 4198.62,2769.84 4208.62,2769.84 4208.62,2759.84 4208.62,2749.84 4218.62,2749.84 4218.62,2759.84 4228.62,2759.84 4228.62,2749.84 4238.62,2749.84 4238.62,2759.84 4248.62,2759.84 4248.62,2749.84 4258.62,2749.84 4258.62,2759.84 4268.62,2759.84 4268.62,2749.84 4278.62,2749.84 4278.62,2759.84 4288.62,2759.84 4288.62,2749.84 4298.62,2749.84 4298.62,2759.84 4308.62,2759.84 4308.62,2749.84 4318.62,2749.84 4318.62,2759.84 4328.62,2759.84 4328.62,2749.84 4338.62,2749.84 4338.62,2759.84 4348.62,2759.84 4348.62,2749.84 4358.62,2749.84 4358.62,2759.84 4368.62,2759.84 4368.62,2749.84 4378.62,2749.84 4378.62,2759.84 4388.62,2759.84 4388.62,2749.84 4398.62,2749.84 4398.62,2759.84 4408.62,2759.84 4408.62,2749.84 4418.62,2749.84 4418.62,2759.84 4428.62,2759.84 4428.62,2749.84 4438.62,2749.84 4438.62,2759.84 4448.62,2759.84 4448.62,2749.84 4458.62,2749.84 4458.62,2759.84 4468.62,2759.84 4468.62,2749.84 4478.62,2749.84 4478.62,2759.84 4488.62,2759.84 4488.62,2749.84 4498.62,2749.84 4498.62,2759.84 4508.62,2759.84 4508.62,2749.84 4518.62,2749.84 4518.62,2759.84 4523.62,2759.84 4578.74,2759.84 4638.08,2759.84 4693.95,2703.97 4707.62,2703.97 4715.93,2712.28 4758.36,2712.28 4768.67,2722.6 4778.44,2722.6 4789.84,2734 4789.84,2750.19 4804.18,2764.53 4817.85,2764.53 4827.51,2754.86 4827.51,2750.94 4833.61,2744.85 4945.63,2744.85 v1(4960.63,2759.84)
A8: U1.F13 U2.K8 | length 1380.3
  L1 w5: U1.F13@3976.38,2736.22 v1(3996.06,2755.91) ; v1(4739.03,2794.14) 4755.91,2777.27 U2.K8@4755.91,2775.59
  L4 w5: v1(3996.06,2755.91) 4058.3,2818.15 4121.3,2818.15 4129.92,2826.77 4141.73,2826.77 4146.73,2826.77 4146.73,2831.77 4156.73,2831.77 4156.73,2826.77 4156.73,2821.77 4166.73,2821.77 4166.73,2826.77 4166.73,2831.77 4176.73,2831.77 4176.73,2826.77 4176.73,2821.77 4186.73,2821.77 4186.73,2826.77 4186.73,2831.77 4196.73,2831.77 4196.73,2826.77 4196.73,2821.77 4206.73,2821.77 4206.73,2826.77 4206.73,2831.77 4216.73,2831.77 4216.73,2826.77 4216.73,2821.77 4226.73,2821.77 4226.73,2826.77 4226.73,2831.77 4236.73,2831.77 4236.73,2826.77 4236.73,2821.77 4246.73,2821.77 4246.73,2826.77 4246.73,2831.77 4256.73,2831.77 4256.73,2826.77 4256.73,2821.77 4266.73,2821.77 4266.73,2826.77 4266.73,2831.77 4276.73,2831.77 4276.73,2826.77 4276.73,2821.77 4286.73,2821.77 4286.73,2826.77 4286.73,2831.77 4296.73,2831.77 4296.73,2826.77 4296.73,2821.77 4306.73,2821.77 4306.73,2826.77 4306.73,2831.77 4316.73,2831.77 4316.73,2826.77 4316.73,2821.77 4326.73,2821.77 4326.73,2826.77 4326.73,2831.77 4336.73,2831.77 4336.73,2826.77 4336.73,2821.77 4346.73,2821.77 4346.73,2826.77 4346.73,2831.77 4356.73,2831.77 4356.73,2826.77 4356.73,2821.77 4366.73,2821.77 4366.73,2826.77 4366.73,2831.77 4376.73,2831.77 4376.73,2826.77 4376.73,2821.77 4386.73,2821.77 4386.73,2826.77 4386.73,2831.77 4396.73,2831.77 4396.73,2826.77 4396.73,2821.77 4406.73,2821.77 4406.73,2826.77 4406.73,2831.77 4416.73,2831.77 4416.73,2826.77 4416.73,2821.77 4426.73,2821.77 4426.73,2826.77 4426.73,2831.77 4436.73,2831.77 4436.73,2826.77 4436.73,2821.77 4446.73,2821.77 4446.73,2826.77 4446.73,2831.77 4456.73,2831.77 4456.73,2826.77 4456.73,2821.77 4466.73,2821.77 4466.73,2826.77 4466.73,2831.77 4476.73,2831.77 4476.73,2826.77 4476.73,2821.77 4486.73,2821.77 4486.73,2826.77 4486.73,2831.77 4496.73,2831.77 4496.73,2826.77 4496.73,2821.77 4506.73,2821.77 4506.73,2826.77 4506.73,2831.77 4516.73,2831.77 4516.73,2826.77 4516.73,2821.77 4526.73,2821.77 4526.73,2826.77 4526.73,2831.77 4536.73,2831.77 4536.73,2826.77 4536.73,2821.77 4546.73,2821.77 4546.73,2826.77 4546.73,2831.77 4556.73,2831.77 4556.73,2826.77 4556.73,2821.77 4566.73,2821.77 4566.73,2826.77 4566.73,2831.77 4576.73,2831.77 4576.73,2826.77 4576.73,2821.77 4586.73,2821.77 4586.73,2826.77 4586.73,2831.77 4596.73,2831.77 4596.73,2826.77 4633.86,2826.77 4637.8,2826.77 4680.27,2784.3 4695.79,2768.78 4704.1,2768.78 4729.54,2743.34 4746.99,2743.34 4756.66,2753.01 4756.66,2776.51 v1(4739.03,2794.14)
A9: U1.F14 U2.K3 | length 1376.3
  L1 w5: U1.F14@4015.75,2736.22 v1(4035.43,2755.91) ; v1(4893.7,2791.34) 4897.64,2791.34 U2.K3@4913.39,2775.59
  L4 w5: v1(4035.43,2755.91) 4061.93,2782.41 4177.17,2782.41 4216.54,2782.41 4220.98,2782.41 4220.98,2787.41 4230.98,2787.41 4230.98,2782.41 4230.98,2777.41 4240.98,2777.41 4240.98,2782.41 4240.98,2787.41 4250.98,2787.41 4250.98,2782.41 4250.98,2777.41 4260.98,2777.41 4260.98,2782.41 4260.98,2787.41 4270.98,2787.41 4270.98,2782.41 4270.98,2777.41 4280.98,2777.41 4280.98,2782.41 4280.98,2787.41 4290.98,2787.41 4290.98,2782.41 4290.98,2777.41 4300.98,2777.41 4300.98,2782.41 4300.98,2787.41 4310.98,2787.41 4310.98,2782.41 4310.98,2777.41 4320.98,2777.41 4320.98,2782.41 4320.98,2787.41 4330.98,2787.41 4330.98,2782.41 4330.98,2777.41 4340.98,2777.41 4340.98,2782.41 4340.98,2787.41 4350.98,2787.41 4350.98,2782.41 4350.98,2777.41 4360.98,2777.41 4360.98,2782.41 4360.98,2787.41 4370.98,2787.41 4370.98,2782.41 4370.98,2777.41 4380.98,2777.41 4380.98,2782.41 4380.98,2787.41 4390.98,2787.41 4390.98,2782.41 4390.98,2777.41 4400.98,2777.41 4400.98,2782.41 4400.98,2787.41 4410.98,2787.41 4410.98,2782.41 4410.98,2777.41 4420.98,2777.41 4420.98,2782.41 4420.98,2787.41 4430.98,2787.41 4430.98,2782.41 4430.98,2777.41 4440.98,2777.41 4440.98,2782.41 4440.98,2787.41 4450.98,2787.41 4450.98,2782.41 4450.98,2777.41 4460.98,2777.41 4460.98,2782.41 4460.98,2787.41 4470.98,2787.41 4470.98,2782.41 4470.98,2777.41 4480.98,2777.41 4480.98,2782.41 4480.98,2787.41 4490.98,2787.41 4490.98,2782.41 4490.98,2777.41 4500.98,2777.41 4500.98,2782.41 4500.98,2787.41 4510.98,2787.41 4510.98,2782.41 4510.98,2777.41 4520.98,2777.41 4520.98,2782.41 4520.98,2787.41 4530.98,2787.41 4530.98,2782.41 4530.98,2777.41 4540.98,2777.41 4540.98,2782.41 4540.98,2787.41 4550.98,2787.41 4550.98,2782.41 4550.98,2777.41 4560.98,2777.41 4560.98,2782.41 4560.98,2787.41 4570.98,2787.41 4570.98,2782.41 4570.98,2777.41 4580.98,2777.41 4580.98,2782.41 4580.98,2787.41 4590.98,2787.41 4590.98,2782.41 4590.98,2777.41 4600.98,2777.41 4600.98,2782.41 4600.98,2787.41 4610.98,2787.41 4610.98,2782.41 4620.98,2782.41 4625.98,2782.41 4648.52,2782.41 4693.95,2736.97 4707.62,2736.97 4722.31,2722.28 4754.22,2722.28 4764.53,2732.6 4774.3,2732.6 4779.84,2738.14 4779.84,2754.33 4816.85,2791.34 v1(4893.7,2791.34)
A10: U1.C15 U2.H2 | length 1379.7
  L1 w5: U1.C15@4055.12,2854.33 v1(4074.8,2874.02) ; U2.H2@4944.88,2712.6 v1(4960.62,2728.34)
  L4 w5: v1(4074.8,2874.02) 4048.3,2900.52 4048.3,2924.36 4063.83,2939.89 4099.77,2939.89 4117.98,2921.68 4129.92,2921.68 4134.92,2921.68 4144.92,2921.68 4144.92,2916.68 4154.92,2916.68 4154.92,2921.68 4154.92,2926.68 4164.92,2926.68 4164.92,2921.68 4164.92,2916.68 4174.92,2916.68 4174.92,2921.68 4174.92,2926.68 4184.92,2926.68 4184.92,2921.68 4184.92,2916.68 4194.92,2916.68 4194.92,2921.68 4194.92,2926.68 4204.92,2926.68 4204.92,2921.68 4204.92,2916.68 4214.92,2916.68 4214.92,2921.68 4214.92,2926.68 4224.92,2926.68 4224.92,2921.68 4224.92,2916.68 4234.92,2916.68 4234.92,2921.68 4234.92,2926.68 4244.92,2926.68 4244.92,2921.68 4244.92,2916.68 4254.92,2916.68 4254.92,2921.68 4254.92,2926.68 4264.92,2926.68 4264.92,2921.68 4264.92,2916.68 4274.92,2916.68 4274.92,2921.68 4274.92,2926.68 4284.92,2926.68 4284.92,2921.68 4284.92,2916.68 4294.92,2916.68 4294.92,2921.68 4294.92,2926.68 4304.92,2926.68 4304.92,2921.68 4304.92,2916.68 4314.92,2916.68 4314.92,2921.68 4314.92,2926.68 4324.92,2926.68 4324.92,2921.68 4324.92,2916.68 4334.92,2916.68 4334.92,2921.68 4346.46,2921.68 4374.02,2921.68 4680.68,2921.68 4765.6,2836.77 4915.79,2836.77 4922.29,2843.27 4935.96,2843.27 4977.13,2802.09 4977.13,2744.85 v1(4960.62,2728.34)
A11: U1.G11 U2.K7 | length 1375.1
  L1 w5: U1.G11@3897.64,2696.85 3913.38,2712.59 v1(3913.38,2720.47) ; v1@4771.66,2791.33 U2.K7@4787.4,2775.59
  L4 w5: v1(3913.38,2720.47) 3976.66,2720.47 3989.23,2733.04 3996.53,2733.04 4012.56,2749.07 4012.56,2756.66 4048.31,2792.41 4129.92,2792.41 4140.67,2803.15 4149.61,2803.15 4154.61,2803.15 4164.61,2803.15 4164.61,2798.15 4174.61,2798.15 4174.61,2803.15 4174.61,2808.15 4184.61,2808.15 4184.61,2803.15 4184.61,2798.15 4194.61,2798.15 4194.61,2803.15 4194.61,2808.15 4204.61,2808.15 4204.61,2803.15 4204.61,2798.15 4214.61,2798.15 4214.61,2803.15 4214.61,2808.15 4224.61,2808.15 4224.61,2803.15 4224.61,2798.15 4234.61,2798.15 4234.61,2803.15 4234.61,2808.15 4244.61,2808.15 4244.61,2803.15 4244.61,2798.15 4254.61,2798.15 4254.61,2803.15 4254.61,2808.15 4264.61,2808.15 4264.61,2803.15 4264.61,2798.15 4274.61,2798.15 4274.61,2803.15 4274.61,2808.15 4284.61,2808.15 4284.61,2803.15 4284.61,2798.15 4294.61,2798.15 4294.61,2803.15 4294.61,2808.15 4304.61,2808.15 4304.61,2803.15 4304.61,2798.15 4314.61,2798.15 4314.61,2803.15 4314.61,2808.15 4324.61,2808.15 4324.61,2803.15 4324.61,2798.15 4334.61,2798.15 4334.61,2803.15 4334.61,2808.15 4344.61,2808.15 4344.61,2803.15 4344.61,2798.15 4354.61,2798.15 4354.61,2803.15 4354.61,2808.15 4364.61,2808.15 4364.61,2803.15 4364.61,2798.15 4374.61,2798.15 4374.61,2803.15 4374.61,2808.15 4384.61,2808.15 4384.61,2803.15 4384.61,2798.15 4394.61,2798.15 4394.61,2803.15 4394.61,2808.15 4404.61,2808.15 4404.61,2803.15 4404.61,2798.15 4414.61,2798.15 4414.61,2803.15 4414.61,2808.15 4424.61,2808.15 4424.61,2803.15 4424.61,2798.15 4434.61,2798.15 4434.61,2803.15 4434.61,2808.15 4444.61,2808.15 4444.61,2803.15 4444.61,2798.15 4454.61,2798.15 4454.61,2803.15 4454.61,2808.15 4464.61,2808.15 4464.61,2803.15 4464.61,2798.15 4474.61,2798.15 4474.61,2803.15 4474.61,2808.15 4484.61,2808.15 4484.61,2803.15 4484.61,2798.15 4494.61,2798.15 4494.61,2803.15 4494.61,2808.15 4504.61,2808.15 4504.61,2803.15 4504.61,2798.15 4514.61,2798.15 4514.61,2803.15 4519.69,2803.15 4578.74,2803.15 4647.28,2803.15 4703.45,2746.97 4711.76,2746.97 4726.45,2732.28 4750.07,2732.28 4769.84,2752.05 4769.84,2789.53 v1(4771.64,2791.33)
A12: U1.D16 U2.L2 | length 1376.9
  L1 w5: U1.D16@4094.49,2814.96 v1(4114.17,2834.65) ; v1(4929.12,2826.77) 4929.12,2822.84 U2.L2@4944.88,2807.09
  L4 w5: v1(4114.17,2834.65) 4110.24,2834.65 4091.3,2853.58 4091.3,2880.85 4081.64,2890.52 4074.34,2890.52 4058.3,2906.55 4058.3,2920.22 4067.97,2929.89 4093.74,2929.89 4116.94,2906.68 4358.27,2906.68 4368.23,2906.68 4368.23,2911.68 4378.23,2911.68 4378.23,2906.68 4378.23,2901.68 4388.23,2901.68 4388.23,2906.68 4388.23,2911.68 4398.23,2911.68 4398.23,2906.68 4398.23,2901.68 4408.23,2901.68 4408.23,2906.68 4408.23,2911.68 4418.23,2911.68 4418.23,2906.68 4418.23,2901.68 4428.23,2901.68 4428.23,2906.68 4428.23,2911.68 4438.23,2911.68 4438.23,2906.68 4438.23,2901.68 4448.23,2901.68 4448.23,2906.68 4448.23,2911.68 4458.23,2911.68 4458.23,2906.68 4458.23,2901.68 4468.23,2901.68 4468.23,2906.68 4468.23,2911.68 4478.23,2911.68 4478.23,2906.68 4478.23,2901.68 4488.23,2901.68 4488.23,2906.68 4488.23,2911.68 4498.23,2911.68 4498.23,2906.68 4498.23,2901.68 4508.23,2901.68 4508.23,2906.68 4508.23,2911.68 4518.23,2911.68 4518.23,2906.68 4518.23,2901.68 4528.23,2901.68 4528.23,2906.68 4528.23,2911.68 4538.23,2911.68 4538.23,2906.68 4538.23,2901.68 4548.23,2901.68 4548.23,2906.68 4548.23,2911.68 4558.23,2911.68 4558.23,2906.68 4558.23,2901.68 4568.23,2901.68 4568.23,2906.68 4568.23,2911.68 4578.23,2911.68 4578.23,2906.68 4578.23,2901.68 4588.23,2901.68 4588.23,2906.68 4588.23,2911.68 4598.23,2911.68 4598.23,2906.68 4598.23,2901.68 4608.23,2901.68 4608.23,2906.68 4608.23,2911.68 4618.23,2911.68 4618.23,2906.68 4618.23,2901.68 4628.23,2901.68 4628.23,2906.68 4628.23,2911.68 4638.23,2911.68 4638.23,2906.68 4638.23,2901.68 4648.23,2901.68 4648.23,2906.68 4648.23,2911.68 4658.23,2911.68 4658.23,2906.68 4668.23,2906.68 4673.23,2906.68 4681.1,2906.68 4761.01,2826.77 v1(4929.12,2826.77)
A13: U1.B15 U2.L8 | length 1377.6
  L1 w5: U1.B15@4055.12,2893.7 v1(4074.8,2913.39) ; v1(4740.16,2822.83) U2.L8@4755.91,2807.09
  L4 w5: v1(4074.8,2913.39) 4096.09,2913.39 4112.8,2896.68 4115.13,2896.68 4133.86,2877.95 4149.61,2877.95 4154.61,2877.95 4154.61,2887.95 4164.61,2887.95 4164.61,2877.95 4174.61,2877.95 4177.17,2877.95 4182.17,2877.95 4192.17,2877.95 4202.17,2877.95 4202.17,2887.95 4212.17,2887.95 4212.17,2877.95 4222.17,2877.95 4222.17,2887.95 4232.17,2887.95 4232.17,2877.95 4242.17,2877.95 4242.17,2887.95 4252.17,2887.95 4252.17,2877.95 4262.17,2877.95 4262.17,2887.95 4272.17,2887.95 4272.17,2877.95 4282.17,2877.95 4282.17,2887.95 4292.17,2887.95 4292.17,2877.95 4302.17,2877.95 4302.17,2887.95 4312.17,2887.95 4312.17,2877.95 4322.17,2877.95 4322.17,2887.95 4332.17,2887.95 4332.17,2877.95 4342.17,2877.95 4342.17,2887.95 4352.17,2887.95 4352.17,2877.95 4362.17,2877.95 4362.17,2887.95 4372.17,2887.95 4372.17,2877.95 4382.17,2877.95 4382.17,2887.95 4392.17,2887.95 4392.17,2877.95 4402.17,2877.95 4402.17,2887.95 4412.17,2887.95 4412.17,2877.95 4422.17,2877.95 4422.17,2887.95 4432.17,2887.95 4432.17,2877.95 4442.17,2877.95 4442.17,2887.95 4452.17,2887.95 4452.17,2877.95 4462.17,2877.95 4462.17,2887.95 4472.17,2887.95 4472.17,2877.95 4482.17,2877.95 4482.17,2887.95 4492.17,2887.95 4492.17,2877.95 4502.17,2877.95 4502.17,2887.95 4512.17,2887.95 4512.17,2877.95 4512.17,2867.95 4522.17,2867.95 4522.17,2877.95 4522.17,2887.95 4532.17,2887.95 4532.17,2877.95 4532.17,2867.95 4542.17,2867.95 4542.17,2877.95 4542.17,2887.95 4552.17,2887.95 4552.17,2877.95 4552.17,2867.95 4562.17,2867.95 4562.17,2877.95 4562.17,2887.95 4572.17,2887.95 4572.17,2877.95 4572.17,2867.95 4582.17,2867.95 4582.17,2877.95 4582.17,2887.95 4592.17,2887.95 4592.17,2877.95 4592.17,2867.95 4602.17,2867.95 4602.17,2877.95 4602.17,2887.95 4612.17,2887.95 4612.17,2877.95 4612.17,2867.95 4622.17,2867.95 4622.17,2877.95 4622.17,2887.95 4632.17,2887.95 4632.17,2877.95 4632.17,2867.95 4642.17,2867.95 4642.17,2877.95 4642.17,2887.95 4652.17,2887.95 4652.17,2877.95 4657.48,2877.95 4692.91,2877.95 4740.16,2830.71 v1(4740.16,2822.83)
BA0: U1.G14 U2.G2 | length 1507.2
  L1 w5: U1.G14@4015.75,2696.85 4015.75,2710.13 4030.59,2724.97 4046.01,2724.97 4049.75,2721.24 4104.74,2721.24 4130.54,2747.05 4148.62,2747.05 4153.62,2747.05 4153.62,2752.05 4163.62,2752.05 4163.62,2747.05 4163.62,2742.05 4173.62,2742.05 4173.62,2747.05 4173.62,2752.05 4183.62,2752.05 4183.62,2747.05 4183.62,2742.05 4193.62,2742.05 4193.62,2747.05 4193.62,2752.05 4203.62,2752.05 4203.62,2747.05 4203.62,2742.05 4213.62,2742.05 4213.62,2747.05 4213.62,2752.05 4223.62,2752.05 4223.62,2747.05 4223.62,2742.05 4233.62,2742.05 4233.62,2747.05 4233.62,2752.05 4243.62,2752.05 4243.62,2747.05 4243.62,2742.05 4253.62,2742.05 4253.62,2747.05 4253.62,2752.05 4263.62,2752.05 4263.62,2747.05 4263.62,2742.05 4273.62,2742.05 4273.62,2747.05 4273.62,2752.05 4283.62,2752.05 4283.62,2747.05 4283.62,2742.05 4293.62,2742.05 4293.62,2747.05 4293.62,2752.05 4303.62,2752.05 4303.62,2747.05 4303.62,2742.05 4313.62,2742.05 4313.62,2747.05 4313.62,2752.05 4323.62,2752.05 4323.62,2747.05 4323.62,2742.05 4333.62,2742.05 4333.62,2747.05 4333.62,2752.05 4343.62,2752.05 4343.62,2747.05 4343.62,2742.05 4353.62,2742.05 4353.62,2747.05 4353.62,2752.05 4363.62,2752.05 4363.62,2747.05 4363.62,2742.05 4373.62,2742.05 4373.62,2747.05 4373.62,2752.05 4383.62,2752.05 4383.62,2747.05 4383.62,2742.05 4393.62,2742.05 4393.62,2747.05 4394.69,2747.05 4628.17,2747.05 4727.58,2846.46 4991.84,2846.46 5015.75,2822.55 5015.75,2728.63 4998.96,2711.85 4975.63,2711.85 U2.G2@4944.88,2681.1
BA1: U1.G16 U2.G3 | length 1509.3
  L1 w5: U1.G16@4094.49,2696.85 4122.05,2724.41 4131.89,2724.41 4136.89,2724.41 4136.89,2730.91 4146.89,2730.91 4146.89,2724.41 4146.89,2717.91 4156.89,2717.91 4156.89,2724.41 4156.89,2730.91 4166.89,2730.91 4166.89,2724.41 4166.89,2717.91 4176.89,2717.91 4176.89,2724.41 4176.89,2730.91 4186.89,2730.91 4186.89,2724.41 4186.89,2717.91 4196.89,2717.91 4196.89,2724.41 4196.89,2730.91 4206.89,2730.91 4206.89,2724.41 4206.89,2717.91 4216.89,2717.91 4216.89,2724.41 4216.89,2730.91 4226.89,2730.91 4226.89,2724.41 4226.89,2717.91 4236.89,2717.91 4236.89,2724.41 4236.89,2730.91 4246.89,2730.91 4246.89,2724.41 4246.89,2717.91 4256.89,2717.91 4256.89,2724.41 4256.89,2730.91 4266.89,2730.91 4266.89,2724.41 4266.89,2717.91 4276.89,2717.91 4276.89,2724.41 4276.89,2730.91 4286.89,2730.91 4286.89,2724.41 4286.89,2717.91 4296.89,2717.91 4296.89,2724.41 4296.89,2730.91 4306.89,2730.91 4306.89,2724.41 4306.89,2717.91 4316.89,2717.91 4316.89,2724.41 4316.89,2730.91 4326.89,2730.91 4326.89,2724.41 4326.89,2717.91 4336.89,2717.91 4336.89,2724.41 4336.89,2730.91 4346.89,2730.91 4346.89,2724.41 4346.89,2717.91 4356.89,2717.91 4356.89,2724.41 4356.89,2730.91 4366.89,2730.91 4366.89,2724.41 4366.89,2717.91 4376.89,2717.91 4376.89,2724.41 4376.89,2730.91 4386.89,2730.91 4386.89,2724.41 4386.89,2717.91 4396.89,2717.91 4396.89,2724.41 4396.89,2730.91 4406.89,2730.91 4406.89,2724.41 4406.89,2717.91 4416.89,2717.91 4416.89,2724.41 4416.89,2730.91 4426.89,2730.91 4426.89,2724.41 4426.89,2717.91 4436.89,2717.91 4436.89,2724.41 4436.89,2730.91 4446.89,2730.91 4446.89,2724.41 4446.89,2717.91 4456.89,2717.91 4456.89,2724.41 4456.89,2730.91 4466.89,2730.91 4466.89,2724.41 4466.89,2717.91 4476.89,2717.91 4476.89,2724.41 4476.89,2730.91 4486.89,2730.91 4486.89,2724.41 4486.89,2717.91 4496.89,2717.91 4496.89,2724.41 4496.89,2730.91 4506.89,2730.91 4506.89,2724.41 4506.89,2717.91 4516.89,2717.91 4516.89,2724.41 4516.89,2730.91 4526.89,2730.91 4526.89,2724.41 4526.89,2717.91 4536.89,2717.91 4536.89,2724.41 4536.89,2730.91 4546.89,2730.91 4546.89,2724.41 4546.89,2717.91 4556.89,2717.91 4556.89,2724.41 4556.89,2730.91 4566.89,2730.91 4566.89,2724.41 4566.89,2717.91 4576.89,2717.91 4576.89,2724.41 4576.89,2730.91 4586.89,2730.91 4586.89,2724.41 4586.89,2717.91 4596.89,2717.91 4596.89,2724.41 4596.89,2730.91 4606.89,2730.91 4606.89,2724.41 4606.89,2717.91 4616.89,2717.91 4616.89,2724.41 4616.89,2730.91 4626.89,2730.91 4626.89,2724.41 4626.89,2717.91 4636.89,2717.91 4636.89,2724.41 4639.76,2724.41 4681.1,2724.41 4693.67,2736.97 4742.4,2736.97 4750.27,2729.1 4837.83,2729.1 4886.58,2680.35 4912.63,2680.35 U2.G3@4913.39,2681.1